# EAGLE board multi-chip (EAGLE 8.2.0)
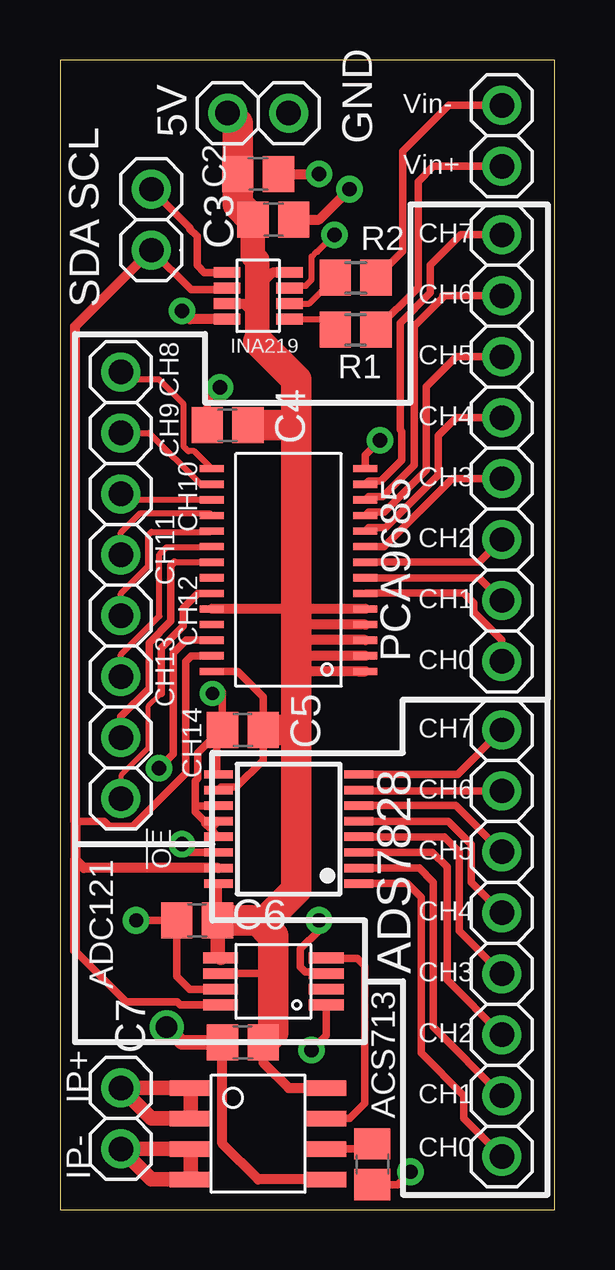
[diagram p0: board, top side]
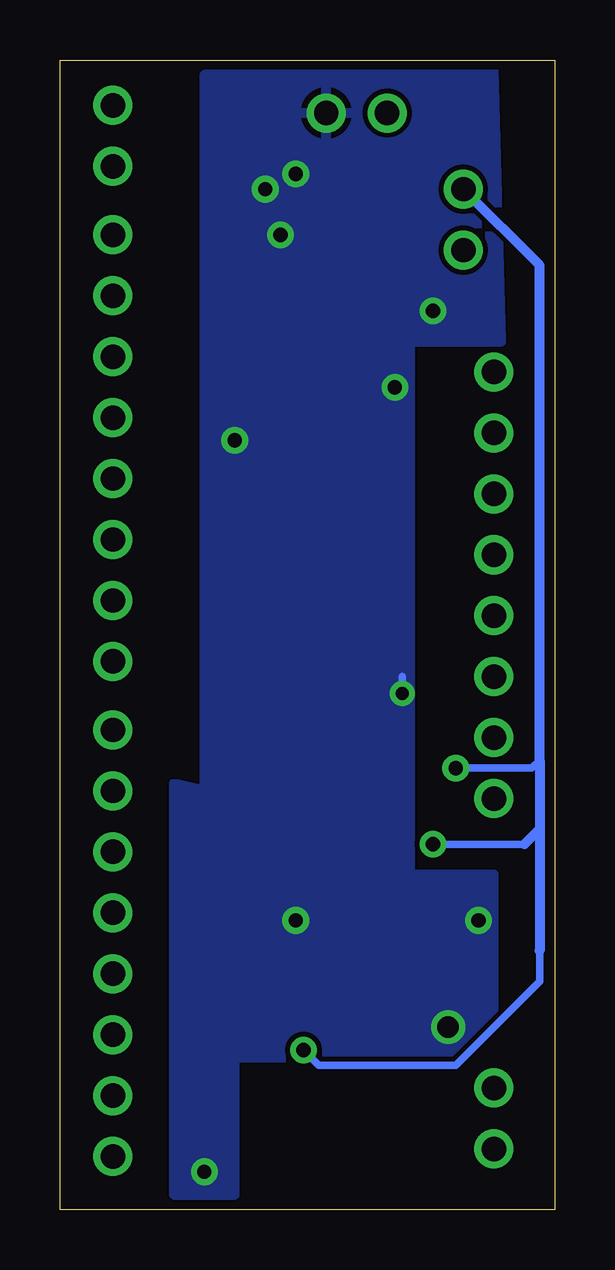
[diagram p1: board, bottom side, seen from below]

Size 20.62 x 47.93 mm. Coordinates in mm from the lower left corner, seen from the top.
Outline: 0,0 20.62,0 20.62,47.93 0,47.93 0,0
Copper layers (1*16): Top 0.035mm / dielectric 1.5mm / Bottom 0.035mm
Design rules "SparkFun *": minimum track width 8mil, minimum drill 20mil, track to track 8mil, track to pad 8mil, pad to pad 7.5mil, via to via 8mil, smd to smd 8mil, copper to edge 15mil, drill to drill 8mil, minimum pad ring 12mil, minimum via ring 10mil, stop-mask expansion 4mil, vias tented up to drill 20mil, thermal gap 10mil

## Footprints (pad centres in the part's own frame; a part is rotated, then mirrored left to right if it is on the bottom)
C0805 = smd 1.3 x 1.5: 1 -0.85,0; 2 0.85,0
1X02 = drill 1.016: 1 -1.27,0; 2 1.27,0
SOT-23-8 = smd 0.45 x 1.1: P$1 -0.975,-1.3; P$2 -0.325,-1.3; P$3 0.325,-1.3; P$4 0.975,-1.3; P$5 0.975,1.3; P$6 0.325,1.3; P$7 -0.325,1.3; P$8 -0.975,1.3
1X08 = drill 1.016: 1 -8.89,0; 2 -6.35,0; 3 -3.81,0; 4 -1.27,0; 5 1.27,0; 6 3.81,0; 7 6.35,0; 8 8.89,0
R0805 = smd 1.3 x 1.5: 1 -0.85,0; 2 0.85,0
TSSOP-28_4MM = smd 1 x 0.3: 1 -3.2,4.225; 2 -3.2,3.575; 3 -3.2,2.925; 4 -3.2,2.275; 5 -3.2,1.625; 6 -3.2,0.975; 7 -3.2,0.325; 8 -3.2,-0.325; 9 -3.2,-0.975; 10 -3.2,-1.625; 11 -3.2,-2.275; 12 -3.2,-2.925; 13 -3.2,-3.575; 14 -3.2,-4.225; 15 3.2,-4.225; 16 3.2,-3.575; 17 3.2,-2.925; 18 3.2,-2.275; 19 3.2,-1.625; 20 3.2,-0.975; 21 3.2,-0.325; 22 3.2,0.325; 23 3.2,0.975; 24 3.2,1.625; 25 3.2,2.275; 26 3.2,2.925; 27 3.2,3.575; 28 3.2,4.225
ACS713-SOIC = smd 0.65 x 1.75: P$1 -1.905,-2.8; P$2 -0.635,-2.8; P$3 0.635,-2.8; P$4 1.905,-2.8; P$5 1.905,2.8; P$6 0.635,2.8; P$7 -0.635,2.8; P$8 -1.905,2.8
VSSOP-8 = smd 0.45 x 1.45: P$1 -0.975,-2.2; P$2 -0.325,-2.2; P$3 0.325,-2.2; P$4 0.975,-2.2; P$5 0.975,2.2; P$6 0.325,2.2; P$7 -0.325,2.2; P$8 -0.975,2.2
TSSOP16 = smd 0.35 x 1.2: 1 -2.275,-2.925; 2 -1.625,-2.925; 3 -0.975,-2.925; 4 -0.325,-2.925; 5 0.325,-2.925; 6 0.975,-2.925; 7 1.625,-2.925; 8 2.275,-2.925; 9 2.275,2.925; 10 1.625,2.925; 11 0.975,2.925; 12 0.325,2.925; 13 -0.325,2.925; 14 -0.975,2.925; 15 -1.625,2.925; 16 -2.275,2.925

## Placement (x,y rotation side)
C1  47n  [C0805]  13.02,1.91 270 top
C2  0.1u  [C0805]  8.26,43.18 0 top
C3  0.1u  [C0805]  8.89,41.27 0 top
C4  0.1u  [C0805]  6.99,32.7 180 top
C5  0.1u  [C0805]  7.62,20 180 top
C6  0.1u  [C0805]  5.71,12.06 180 top
C7  0.1u  [C0805]  7.62,6.99 180 top
I2C  [1X02]  3.81,41.27 90 top
INA219  INA219SOT23  [SOT-23-8]  8.26,38.1 90 top
JP1  [1X08]  2.54,26.04 90 top
JP3  [1X02]  18.41,44.77 90 top
JP4  [1X02]  2.54,3.81 270 top
JP5  [1X08]  18.41,11.11 90 top
JP8  [1X08]  18.41,31.75 90 top
POWER  [1X02]  8.26,45.72 0 top
R1  10  [R0805]  12.32,36.68 180 top
R2  10  [R0805]  12.32,38.85 180 top
U1  PCA9685  [TSSOP-28_4MM]  9.53,26.67 180 top
U$1  ACS713SOIC  [ACS713-SOIC]  8.26,3.17 270 top
U$2  ADC121C021  [VSSOP-8]  8.89,9.53 90 top
U$3  ADS7828  [TSSOP16]  9.53,15.88 90 top

## Library data of the parts
C1-C7 R1 R2 = resistor
I2C JP1 JP3-JP5 JP8 POWER = pinhead
INA219 U$2 U$3 = texas
U1 = NXP; PROD_ID: IC-12240
U$1 = allegro

## Nets
5V: C2.1 C3.1 C4.1 C5.1 C6.1 C7.1 INA219.P$4 INA219.P$7 POWER.1 U1.1 U1.2 U1.3 U1.4 U1.5 U1.24 U1.28 U$1.P$8 U$2.P$5 U$2.P$6 U$3.10 U$3.16
GND: C1.2 C2.2 C3.2 C4.2 C5.2 C6.2 C7.2 INA219.P$3 INA219.P$8 POWER.2 U1.14 U$1.P$5 U$2.P$3 U$2.P$7 U$3.9 U$3.11 U$3.12 U$3.13
IN+: JP3.1 R1.1
IN-: JP3.2 R2.1
N$1: C1.1 U$1.P$6
N$2: INA219.P$1 R1.2
N$3: INA219.P$2 R2.2
N$4: JP1.8 U1.15
N$5: JP4.1 U$1.P$1 U$1.P$2
N$8: JP4.2 U$1.P$3 U$1.P$4
N$9: U$1.P$7 U$2.P$4
N$15: JP5.1 U$3.1
N$16: JP5.2 U$3.2
N$17: JP5.3 U$3.3
N$18: JP5.4 U$3.4
N$19: JP5.5 U$3.5
N$20: JP5.6 U$3.6
N$21: JP5.7 U$3.7
N$22: JP5.8 U$3.8
N$44: JP8.1 U1.6
N$45: JP8.2 U1.7
N$46: JP8.3 U1.8
N$47: JP8.4 U1.9
N$48: JP8.5 U1.10
N$49: JP8.6 U1.11
N$50: JP8.7 U1.12
N$51: JP8.8 U1.13
N$58: JP1.1 U1.23
N$60: JP1.2 U1.21
N$61: JP1.3 U1.20
N$62: JP1.4 U1.19
N$63: JP1.5 U1.18
N$64: JP1.6 U1.17
N$65: JP1.7 U1.16
SCL: I2C.2 INA219.P$5 U1.26 U$2.P$1 U$3.14
SDA: I2C.1 INA219.P$6 U1.27 U$2.P$8 U$3.15

## Tracks (layer width: path | path; a pad name or v marks a point on that pad's centre or on a via)
5V
  Top 0.305: U$2.P$6 8.58,9.85 8.89,10.16 | U$3.10 6.72,17.62 7.35,17.62 8.47,18.74 C5.1 8.47,21.38 7.4,22.45 U1.28 | C6.1 6.6,12.1 U$3.16
  Top 0.406: 12.43,22.45 U1.1 10.06,22.45 9.84,22.23 | INA219.P$7 6.97,37.76 7.67,37.76 7.96,37.47 8.22,37.47 | INA219.P$4 9.54,39.06 8.84,39.06 8.52,38.73 8.22,38.73 | C7.1 8.47,6.13 9.53,5.08 U$1.P$8 | 9.8,25.05 U1.24 | 9.8,25.05 9.84,25.08 | U1.2 9.93,23.09 9.84,23.18 | U1.3 10.23,23.75 10.16,23.81 9.84,23.81 | U1.4 9.89,24.39 9.84,24.45 | U1.5 9.8,25.05
  Top 0.61: U$2.P$5 6.57,10.62 C6.1
  Top 1.016: C3.1 8.04,39.77 8.22,39.59 8.22,38.73 8.22,37.47 8.22,36.23 8.26,36.2
  Top 1.27: POWER.1 7.41,45.3 C2.1 7.41,41.91 C3.1 | C7.1 8.89,7.41 8.89,10.16 8.89,11.43 8.26,12.06 C6.1 8.57,12.06 9.84,13.34 9.84,20 | 9.84,20 9.84,22.23 9.84,23.18 9.84,23.81 9.84,24.45 9.84,25.08 9.84,32.7 | 9.84,32.7 9.84,34.61 8.26,36.2 | C4.1 9.84,32.7 | C5.1 9.84,20
GND  (via drill 0.55, 0.6, 0.9)
  Top 0.203: v6.36,21.52 6.77,21.59
  Top 0.254: 9.51,38.42 INA219.P$3 9.65,38.52 10.24,38.52 10.49,38.77 10.49,39.74 10.68,39.93 10.72,39.93 v11.43,40.64
  Top 0.305: U$2.P$7 5.41,9.2 4.87,9.74 C6.2 v3.17,12.06 | U$2.P$3 11.02,9.92 10.22,9.92 10.01,10.13 10.01,10.87 10.79,11.66 v10.79,12.06 | U1.14 12.72,31.46 v13.34,32.07 | 6.77,21.59 C5.2 6.69,20 6.52,19.83 | C4.2 6.13,33.76 v6.67,34.29 | 6.28,15.88 U$3.13 | 6.28,15.88 6.03,16.12 6.03,16.19 5.64,16.58 5.64,16.83 | 5.64,16.83 5.64,17.88 5.74,17.98 5.74,19.05 6.52,19.83 | U$3.9 6.52,18.23 6.52,19.83 | U$3.11 6.58,16.83 5.64,16.83 | U$3.12 6.28,15.88 | C1.2 14.07,1.05 v14.61,1.59
  Top 0.406: C2.2 v10.79,43.18 | C3.2 10.79,41.27 v12.06,42.55 | INA219.P$8 5.42,37.12 v5.08,37.47 | U$1.P$5 8.26,1.27 6.77,2.75 C7.2
  Top 0.61: C7.2 5.08,6.99 v4.45,7.62
  Bottom 0.305: v6.36,21.52 6.35,22.23
  pour Bottom: 2.54,47.62 14.61,47.31 14.61,17.46 15.88,17.78 15.88,0.64 13.34,0.64 13.34,6.35 2.54,6.35 2.54,13.97 6.03,13.97 6.03,36.2 2.22,36.2
IN+
  Top 0.305: R1.1 14.92,38.44 14.92,42.86 15.56,43.5 JP3.1
IN-
  Top 0.305: R2.1 14.29,39.97 14.29,44.13 16.19,46.04 JP3.2
N$1
  Top 0.305: U$1.P$6 12.8,2.54 C1.1
N$2
  Top 0.254: INA219.P$1 11.02,37.12 R1.2
N$3
  Top 0.254: INA219.P$2 10.39,37.77 R2.2
N$4
  Top 0.254: U1.15 5.6,31.62 5.35,31.62 5.16,31.82 5.16,33.58 4.13,34.61 2.86,34.61 JP1.8
N$5
  Top 0.61: U$1.P$1 U$1.P$2 3.81,3.81 JP4.1 U$1.P$1
N$8
  Top 0.61: U$1.P$3 U$1.P$4 3.81,1.27 JP4.2 U$1.P$3
N$9
  Top 0.305: U$1.P$7 12.06,3.81 12.7,4.45 12.7,10.16 12.38,10.48 11.11,10.48 U$2.P$4
N$15
  Top 0.305: JP5.1 16.83,3.81 16.83,4.76 15.05,6.54 15.05,13.02 14.47,13.6 U$3.1
N$16
  Top 0.305: JP5.2 15.56,7.62 15.56,13.65 14.96,14.25 U$3.2
N$17
  Top 0.305: JP5.3 16.13,9.59 16.13,14.29 15.52,14.9 U$3.3
N$18
  Top 0.305: JP5.4 16.64,11.62 16.64,14.92 16.01,15.55 U$3.4
N$19
  Top 0.305: JP5.5 17.14,13.65 17.14,15.24 16.18,16.2 U$3.5
N$20
  Top 0.305: JP5.6 16.49,16.85 U$3.6
N$21
  Top 0.305: JP5.7 12.49,17.46 U$3.7
N$22
  Top 0.305: U$3.8 16.56,18.15 JP5.8
N$44
  Top 0.305: JP8.1 18.41,23.75 17.25,24.92 17.25,25.3 16.83,25.72 12.75,25.72 U1.6
N$45
  Top 0.305: U1.7 17.47,26.34 JP8.2
N$46
  Top 0.305: U1.8 17.47,27 JP8.3
N$47
  Top 0.305: U1.9 13.5,27.64 16.34,30.48 JP8.4
N$48
  Top 0.305: JP8.5 16.51,33.02 15.77,32.28 15.77,30.63 13.57,28.44 12.87,28.44 U1.10
N$49
  Top 0.305: U1.11 12.87,29.09 13.51,29.09 15.26,30.84 15.26,34.31 16.51,35.56 JP8.6
N$50
  Top 0.305: JP8.7 15.94,38.1 15.94,38.02 14.75,36.83 14.75,31.05 13.44,29.74 12.87,29.74 U1.12
N$51
  Top 0.305: U1.13 12.87,30.39 13.37,30.39 14.24,31.26 14.24,32.44 14.17,32.52 14.17,36.97 15.43,38.23 15.43,39.37 16.7,40.64 JP8.8
N$58
  Top 0.203: 4.22,21.53 3.66,20.97 3.66,19.22 2.54,18.1 JP1.1
  Top 0.305: 4.22,21.53 4.22,23.42 5.13,24.34 5.13,25.08 5.74,25.7 U1.23
N$60
  Top 0.254: U1.21 4.77,27 4.6,26.82
  Top 0.305: JP1.2 2.54,20.57 3.71,21.74 3.71,23.63 4.62,24.55 4.62,26.85 4.77,27
N$61
  Top 0.254: JP1.3 2.54,23.15 4.14,24.75 4.14,27.32 4.45,27.62 6.3,27.62 U1.20
N$62
  Top 0.254: JP1.4 2.54,25.69 3.68,26.83 3.68,28.13 3.81,28.26 6.29,28.26 U1.19
N$63
  Top 0.254: JP1.5 2.54,28.23 3.35,29.04 6.23,29.04 U1.18
N$64
  Top 0.254: U1.17 2.79,29.59 JP1.6
N$65
  Top 0.254: JP1.7 3.72,32.38 5.86,30.25 U1.16
SCL  (via drill 0.6)
  Top 0.305: I2C.2 5.42,40.94 5.42,40.89 5.71,40.59 5.71,39.37 6.01,39.08 INA219.P$5 | v10.48,6.67 11.09,7.28 U$2.P$1 | U1.26 5.26,23.75 4.72,23.21 4.72,19.01 v4.13,18.41 | v5.08,15.24 5.42,14.9 U$3.14
  Bottom 0.305: 0.64,10.79 0.64,9.53 4.13,6.03 9.84,6.03 v10.48,6.67 | v4.13,18.41 0.95,18.41 0.64,18.73 | 1.27,15.24 v5.08,15.24
  Bottom 0.406: 0.64,15.88 0.64,10.79 | 0.64,15.88 0.64,18.73 0.64,39.37 I2C.2 | 0.64,15.88 1.27,15.24
SDA
  Top 0.305: I2C.1 5.46,38.36 7.05,38.36 6.98,38.42 INA219.P$6 | U$2.P$8 5.01,8.55 4.88,8.68 2.75,8.68 0.64,10.79 | U1.27 5.47,23.09 5.23,22.86 5.23,18.19 3.02,15.98 2.06,15.98 1.84,16.19 0.64,16.19
  Top 0.406: I2C.1 0.64,36.83 0.64,16.19 0.64,14.61 | 0.64,10.79 0.64,14.61 | U$3.15 0.99,14.25 0.64,14.61

## Text on the board
tPlace: CH7 | CH6 | CH8 | CH5 | CH9 | CH4 | CH3 | CH10 | CH2 | CH11 | CH1 | CH12 | PCA9685 | CH0 | CH13 | CH14 | CH7 | CH6 | !OE! | CH5 | CH4 | ADS7828 | CH3 | ADC121 | CH2 | IP+ | ACS713 | CH1 | CH0 | IP-
tNames: 5V | Vin- | GND | Vin+ | SCL | SDA